# Altium PCB PCB1.PcbDoc
Units mm, origin at the board's own origin, x right, y up, seen from the top; angles counter-clockwise.
Board outline 50.2 x 48.7 mm, 2 copper layers (Top Layer, Bottom Layer); 7 components, 16 nets, 64 pads, 6 vias.
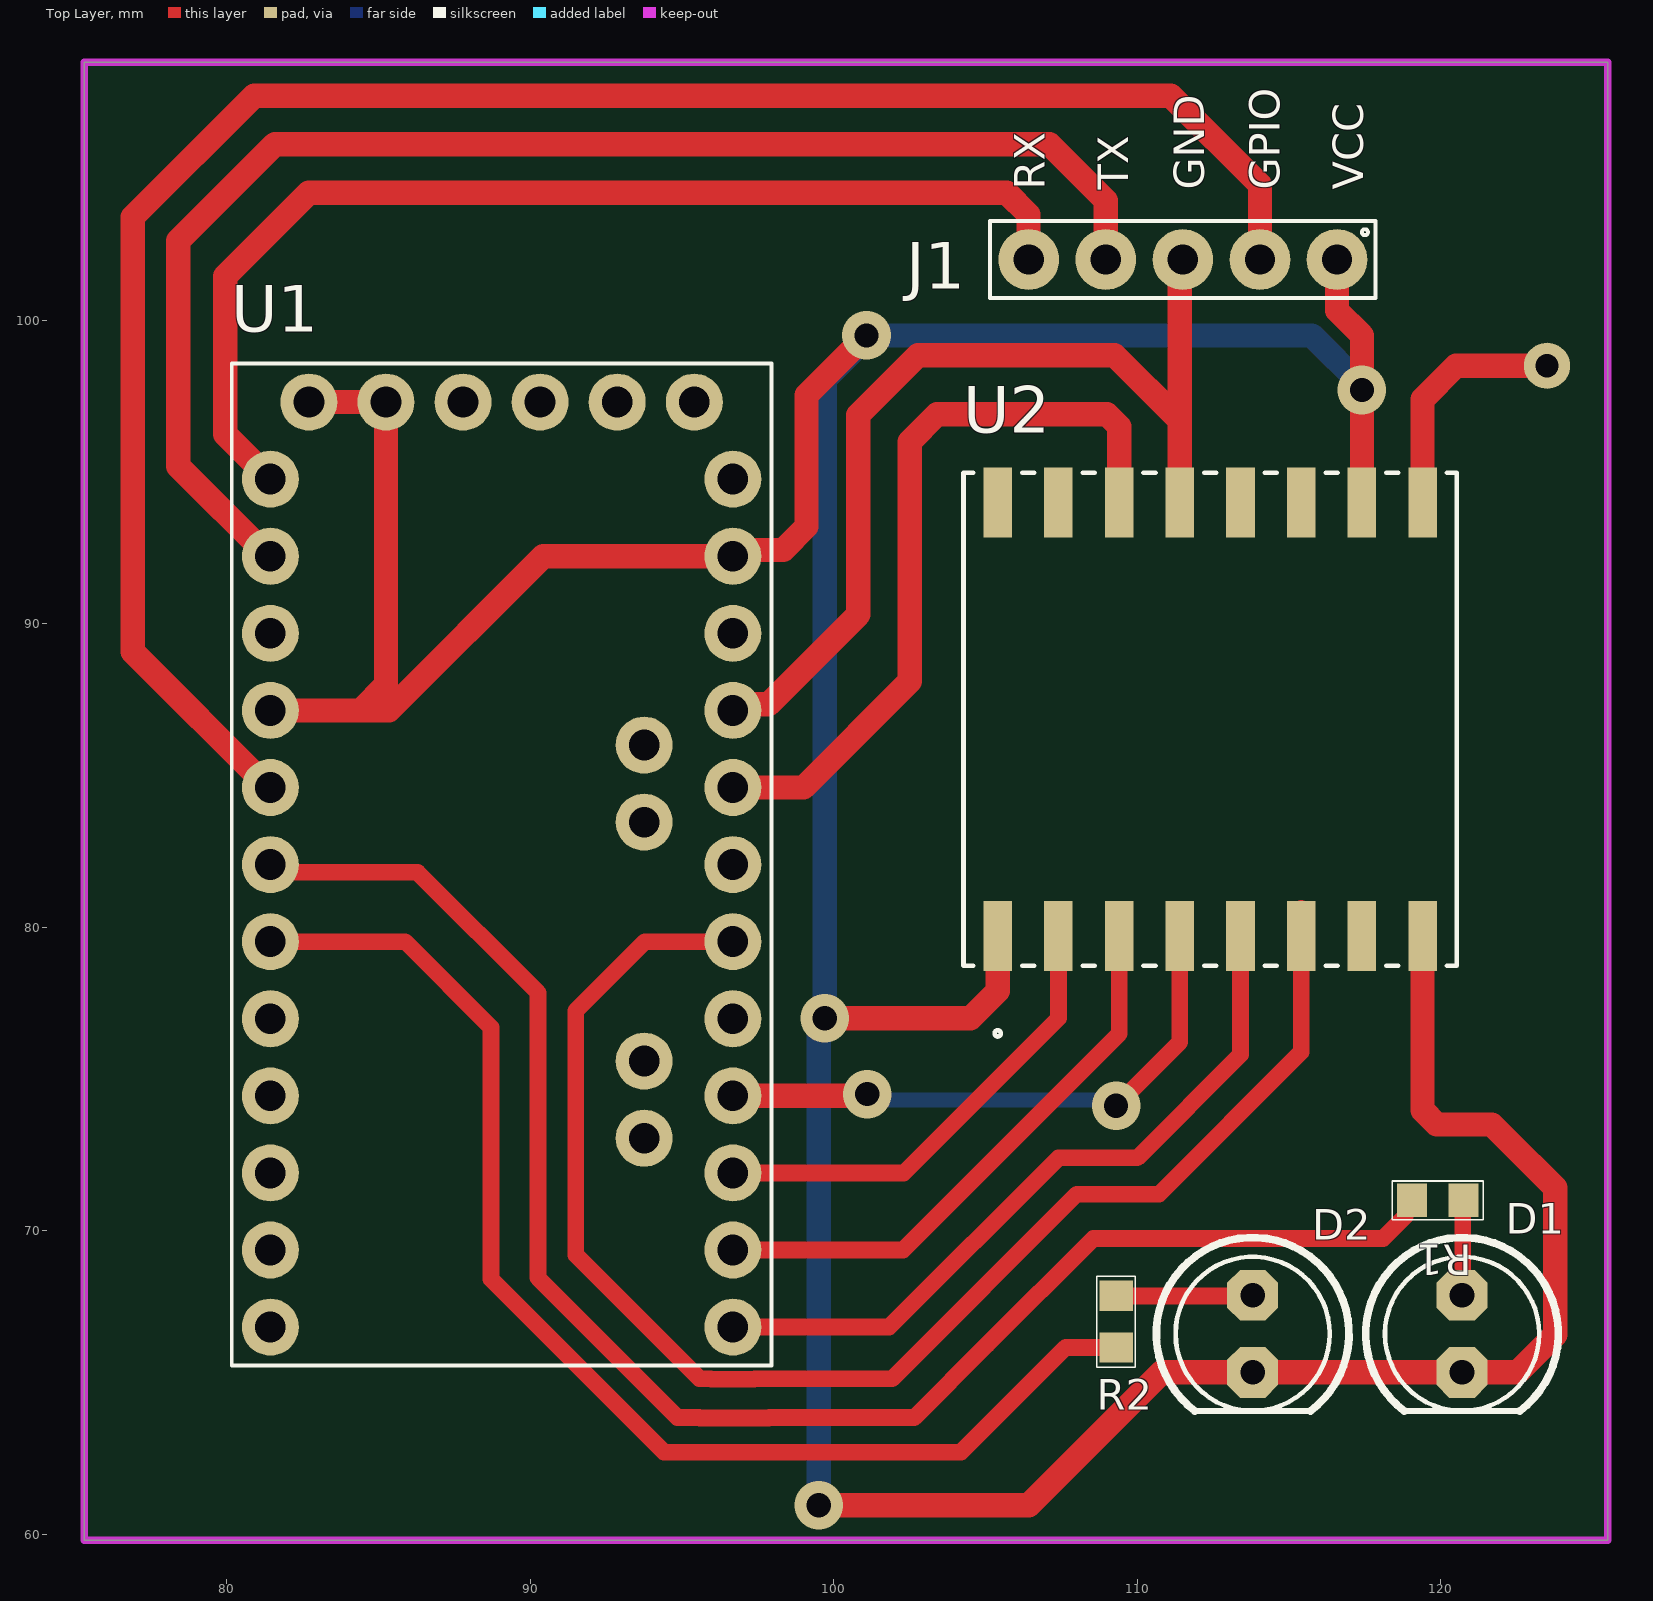
[diagram p0: Top Layer view]
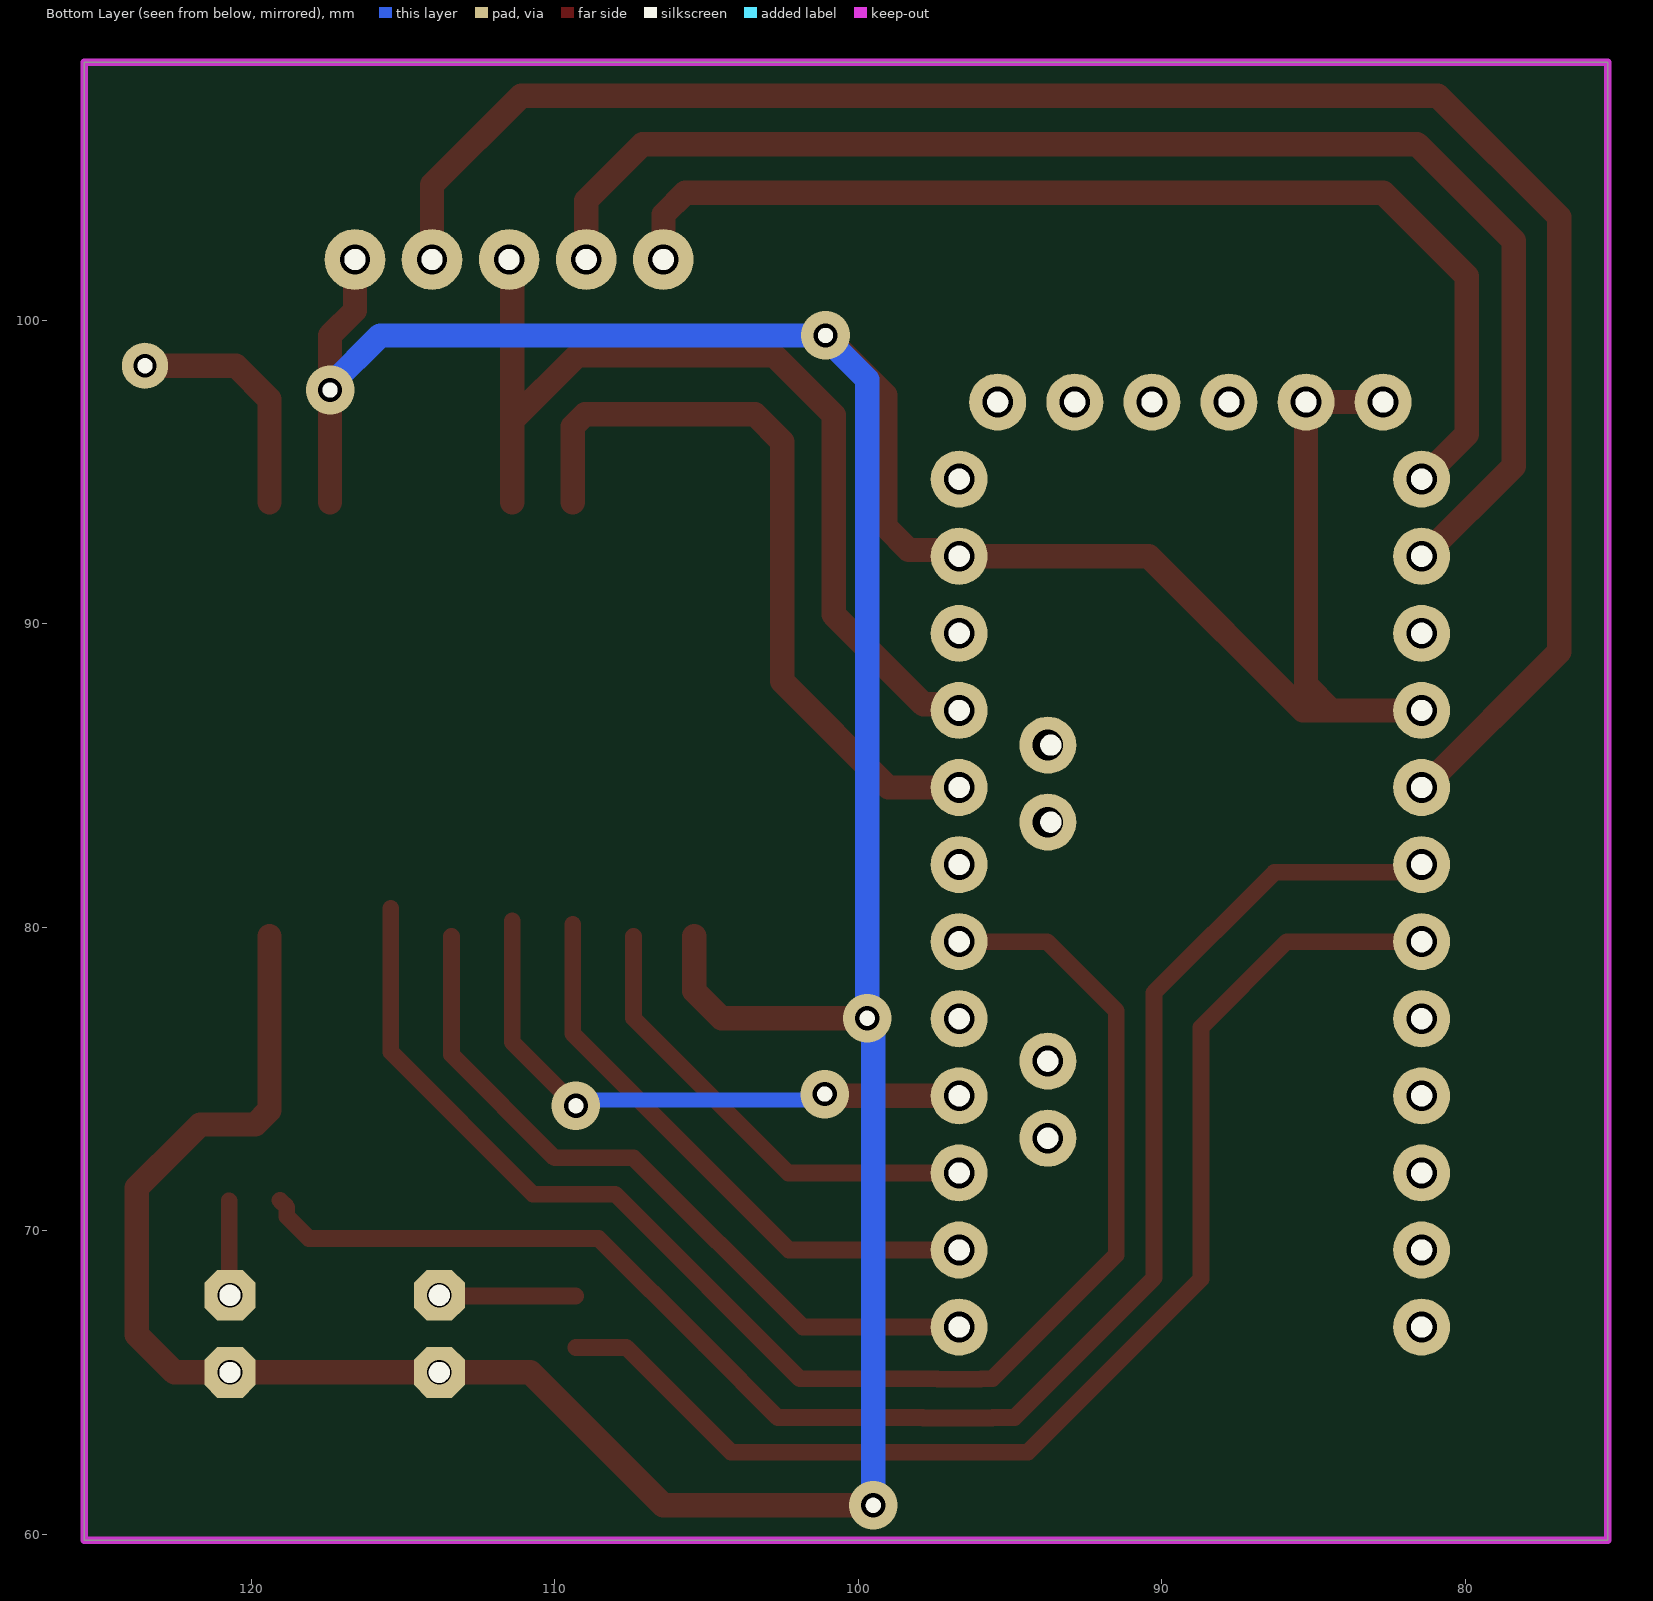
[diagram p1: Bottom Layer view, seen from below]
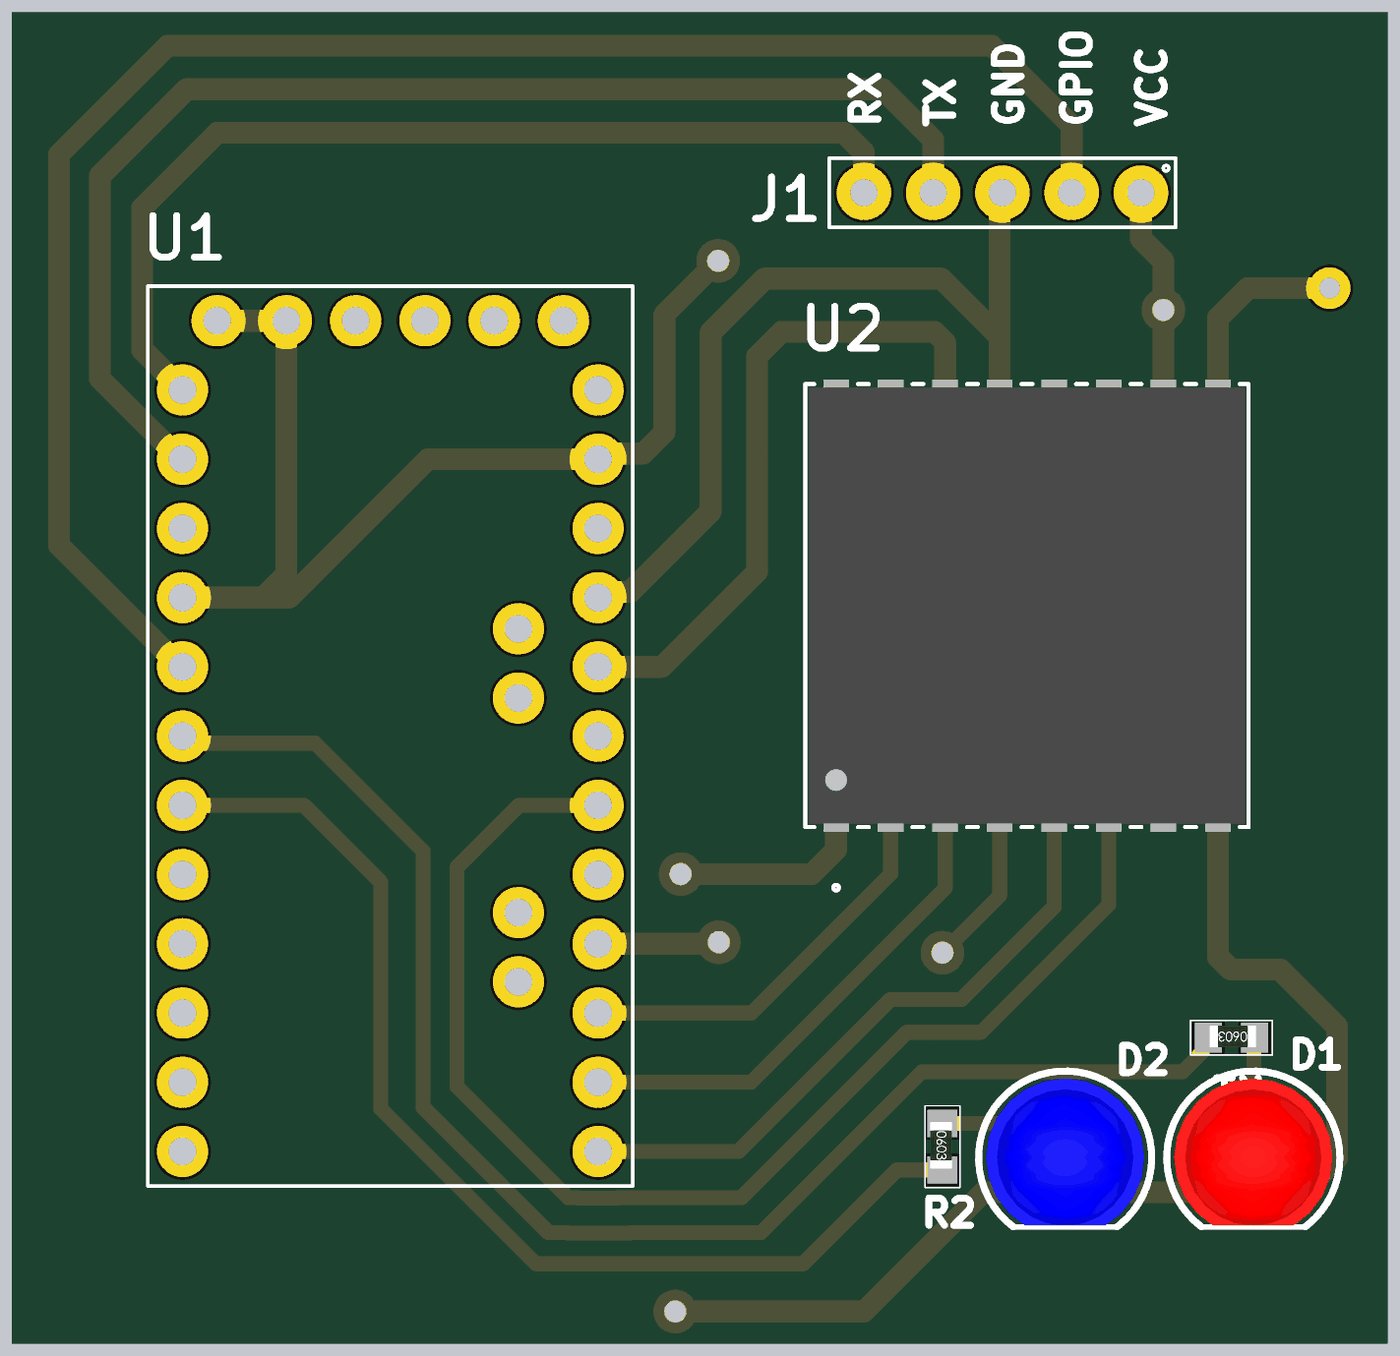
[diagram p2: 3D render of the assembled board from above, using the file's embedded part models]

## Layer stack, top to bottom
Top Solder: solder mask 0.0102, Solder Resist, Dk 3.5
Top Layer: signal copper 0.0356
Dielectric 1: dielectric 0.32, FR-4, Dk 4.8
Bottom Layer: signal copper 0.0356
Bottom Solder: solder mask 0.0102, Solder Resist, Dk 3.5

## Board outline
75.3,59.8 75.3,108.5 125.5,108.5 125.5,59.8

## Design rules (kind name [scope] priority, off if disabled: settings)
Clearance [All] p1: gap=0.5 ignorepadtopadclearanceinfootprint=FALSE except(0: Arc-Hole Track-Hole SMDPad-Hole THPad-Hole Via-Hole Fill-Hole Poly-Hole Region-Hole Text-Hole; 0.254: Via-Via; 0.3: Arc-Via Track-Via Via-Fill Via-Poly Via-Region)
PolygonConnect [All] p1: connectstyle=Relief reliefconductorwidth=0.254 reliefentries=4 polygonreliefangle="90 Angle" airgapwidth=0.254
RoutingVias [All] p1: holewidth=0.711 width=1.27 viastyle="Through Hole" minholewidth=0.711 minwidth=1.27 maxholewidth=0.711 maxwidth=1.27
SolderMaskExpansion [All] p1: expansion=0.102 istentingtop=FALSE
Width [All] p1: maxlimit=2 minlimit=0.152 preferedwidth=0.5
30 further rules are at their usual default settings.

## Components (designator, comment, footprint, x,y, rotation, side; value= is the part's Value field where it differs from the comment)
D1 "5MM-RED" LED5MM-RED 120.7,66.6 r270 top
D2 "5MM-BLUE" LED5MM-BLUE 113.8,66.6 r270 top
J1 "61300511121" 61300511121 111.5,102 r180 top
R1 "470R" R0603 119.9,71 r180 top
R2 "100R" R0603 109.3,67 r270 top
U1 "ARDUINO_PRO_MINI" MODULE_ARDUINO_PRO_MINI 89.051,82.063 r0 top
U2 "RFM95W-915S2" IC16_RFM95W-915S2_RFS 112.4,86.852 r90 top

## Footprints (in the part's own frame and the unit in brackets; to place one, negate y for a bottom-side part, rotate by r counter-clockwise, add the part's x,y. Pads: shape width x height; smd on the part's side, far side on the other; paste and mask are expansions set on the pad)
61300511121 [mm]
  round 2 hole 1: 1(-5.08,0) 2(-2.54,0) 3(0,0) 4(2.54,0) 5(5.08,0)
  silkscreen extent -6.35,-1.27 6.35,1.27
IC16_RFM95W-915S2_RFS [mm]
  rect 2.307x0.941 smd paste+0 mask+0: 1(-7.148,7) 2(-7.148,5) 3(-7.148,3) 4(-7.148,1) 5(-7.148,-1) 6(-7.148,-3) 7(-7.148,-5) 8(-7.148,-7) 9(7.148,-7) 10(7.148,-5) 11(7.148,-3) 12(7.148,-1) 13(7.148,1) 14(7.148,3) 15(7.148,5) 16(7.148,7)
  silkscreen extent -10.45,-8.13 8.13,8.13, body extent -8,-8 8,8, height 1.81
LED5MM-BLUE [mil]
  oct 66x66 hole 32: A(-50,0) C(50,0)
  silkscreen extent -125,-125 100,125, body extent -114,-114 98,114, height 344
LED5MM-RED [mil]
  oct 66x66 hole 32: A(-50,0) C(50,0)
  silkscreen extent -125,-125 100,125, body extent -114,-114 98,114, height 344
MODULE_ARDUINO_PRO_MINI [mil]
  round 74 hole 40: JP1_1(250,600) JP1_2(150,600) JP1_3(50,600) JP1_4(-50,600) JP1_5(-150,600) JP1_6(-250,600) JP2_1(185,55) JP2_2(185,155) JP3_1(185,-355) JP3_2(185,-255) JP6_1(300,500) JP6_2(300,400) JP6_3(300,300) JP6_4(300,200) JP6_5(300,100) JP6_6(300,0) JP6_7(300,-100) JP6_8(300,-200) JP6_9(300,-300) JP6_10(300,-400) JP6_11(300,-500) JP6_12(300,-600) JP7_1(-300,-600) JP7_2(-300,-500) JP7_3(-300,-400) JP7_4(-300,-300) JP7_5(-300,-200) JP7_6(-300,-100) JP7_7(-300,0) JP7_8(-300,100) JP7_9(-300,200) JP7_10(-300,300) JP7_11(-300,400) JP7_12(-300,500)
  silkscreen extent -350,-650 350,650
R0603 [mm]
  rect 1x1.1 smd: 1(-0.85,0) 2(0.85,0)
  silkscreen extent -1.5,-0.64 1.5,0.64, body extent -0.9,-0.45 0.8,0.35, height 0.56

## Part data
D1: library part LED5MM-RED, "LED RED 5MM", Color=Red, Category=Optoelectronics, ComponentLink1Description=https://datasheet.ciiva.com/29562/150141rs73100-29562993.pdf?src-supplier=Digi-Key, ComponentLink1URL=https://datasheet.ciiva.com/29562/150141rs73100-29562993.pdf?src-supplier=Digi-Key, ComponentLink2Description=https://datasheet.ciiva.com/29278/759464-da-01-en-smd-topled-einf-rot-150141rs73100-29278947.pdf?src-supplier=Conrad, ComponentLink2URL=https://datasheet.ciiva.com/29278/759464-da-01-en-smd-topled-einf-rot-150141rs73100-29278947.pdf?src-supplier=Conrad, ComponentLink3Description=https://datasheet.ciiva.com/29563/150141rs73100-29563031.pdf?src-supplier=Digi-Key, ComponentLink3URL=https://datasheet.ciiva.com/29563/150141rs73100-29563031.pdf?src-supplier=Digi-Key, ComponentLink4Description=https://datasheet.ciiva.com/29563/150141rs73100-29563032.pdf?src-supplier=Digi-Key, ComponentLink4URL=https://datasheet.ciiva.com/29563/150141rs73100-29563032.pdf?src-supplier=Digi-Key
D2: library part LED5MM-BLUE, "LED BLUE 5MM", Color=BLUE, Category=Optoelectronics, ComponentLink1Description=https://datasheet.ciiva.com/29562/150141rs73100-29562993.pdf?src-supplier=Digi-Key, ComponentLink1URL=https://datasheet.ciiva.com/29562/150141rs73100-29562993.pdf?src-supplier=Digi-Key, ComponentLink2Description=https://datasheet.ciiva.com/29278/759464-da-01-en-smd-topled-einf-rot-150141rs73100-29278947.pdf?src-supplier=Conrad, ComponentLink2URL=https://datasheet.ciiva.com/29278/759464-da-01-en-smd-topled-einf-rot-150141rs73100-29278947.pdf?src-supplier=Conrad, ComponentLink3Description=https://datasheet.ciiva.com/29563/150141rs73100-29563031.pdf?src-supplier=Digi-Key, ComponentLink3URL=https://datasheet.ciiva.com/29563/150141rs73100-29563031.pdf?src-supplier=Digi-Key, ComponentLink4Description=https://datasheet.ciiva.com/29563/150141rs73100-29563032.pdf?src-supplier=Digi-Key, ComponentLink4URL=https://datasheet.ciiva.com/29563/150141rs73100-29563032.pdf?src-supplier=Digi-Key
J1: "Connector Header Through Hole 5 position 0.100 (2.54mm)", Package=None, Availability="In Stock", Check_prices=https://www.snapeda.com/parts/61300511121/Wurth+Elektronik/view-part/?ref=eda, MF="WÃ¼rth Elektronik", MP=61300511121, Price=None, Purchase-URL=https://pricing.snapeda.com/search/part/61300511121/?ref=eda, SnapEDA_Link=https://www.snapeda.com/parts/61300511121/Wurth+Elektronik/view-part/?ref=snap
R1: library part CRCW0603470RFKEA, "RES SMD 470 OHM 1% 1/10W 0603", Case Code (Metric)=1608, Case Code (Imperial)=0603, Manufacturer 1=Vishay, Max Operating Temperature=155°C, Max Power Dissipation=100mW, Min Operating Temperature=-55°C, Package Quantity=10, Supplier Part Number 1=1469815, Temperature Coefficient=100ppm/°C, Tolerance=1%, Voltage Rating=75V, Case/Package=0603, Category=Resistors, ComponentLink1Description=http://www.vishay.com/docs/20035/dcrcwe3.pdf, ComponentLink1URL=http://www.vishay.com/docs/20035/dcrcwe3.pdf, ComponentLink2Description=http://uk.rs-online.com/webdocs/13ec/0900766b813ecbec.pdf, ComponentLink2URL=http://uk.rs-online.com/webdocs/13ec/0900766b813ecbec.pdf, ComponentLink3Description=https://www.verical.com/server-webapp/html/getDatasheet?partID=45798, ComponentLink3URL=https://www.verical.com/server-webapp/html/getDatasheet?partID=45798, ComponentLink4Description=http://www.vishay.com/docs/20008/dcrcw.pdf, ComponentLink4URL=http://www.vishay.com/docs/20008/dcrcw.pdf, ComponentLink5Description=http://www.mouser.com/ds/2/427/dcrcwe3-109170.pdf, ComponentLink5URL=http://www.mouser.com/ds/2/427/dcrcwe3-109170.pdf, ComponentLink6Description=http://www.farnell.com/datasheets/2111203.pdf, ComponentLink6URL=http://www.farnell.com/datasheets/2111203.pdf, ComponentLink7Description=http://www.farnell.com/datasheets/2045673.pdf, ComponentLink7URL=http://www.farnell.com/datasheets/2045673.pdf, ComponentLink8Description=https://www.distrelec.biz/Web/Downloads/a_/en/flD-CRCW-e3_data_en.pdf?mime=application%2Fpdf, ComponentLink8URL=https://www.distrelec.biz/Web/Downloads/a_/en/flD-CRCW-e3_data_en.pdf?mime=application%2Fpdf, Composition="Thick Film", Contact Plating=Lead,Tin, Depth=0.85mm, Description 1="RES SMD 470 OHM 1% 1/10W 0603", Features="Automotive AEC-Q200", Height=0.45mm, Lead Free="Lead Free", Length=1.55mm, Manufacturer Part Number 1=CRCW0603470RFKEA, Military Standard=Not, Mount="Surface Mount", Number of Terminations=2, Packaging="Tape and Reel", Power Rating=100mW, Pricing 1="10 = 0,01680, 250 = 0,01120, 1000 = 0,00700, 5000 = 0,00540 (EUR)", Radiation Hardening=No, REACH SVHC=Unknown, Resistance=470R, RoHS 1=Yes, Stock=19745, Supplier 1=Farnell, Termination=SMD/SMT, Voltage Rating (DC)=75V, Weight=7.1E-05oz, Width=0.033inch
R2: library part ERJ-P03F1000V, "RESISTOR, SURGE, 0603, 1%, 100R", Case Code (Metric)=1608, Case Code (Imperial)=0603, Manufacturer=Panasonic, Max Operating Temperature=155°C, Min Operating Temperature=-55°C, Package Quantity=5000, Power Rating=200mW, Supplier Part Number 1=P16017CT-ND, Temperature Coefficient=200ppm/°C, Tolerance=1%, Voltage Rating=150V, Case/Package=0603, Category=Resistors, ComponentLink1Description=https://datasheet.ciiva.com/11817/0900766b812cb812-11817071.pdf?src-supplier=RSComponents, ComponentLink1URL=https://datasheet.ciiva.com/11817/0900766b812cb812-11817071.pdf?src-supplier=RSComponents, ComponentLink2Description=https://datasheet.ciiva.com/24024/aoa0000ce4-64075-24024309.pdf?src-supplier=Mouser, ComponentLink2URL=https://datasheet.ciiva.com/24024/aoa0000ce4-64075-24024309.pdf?src-supplier=Mouser, ComponentLink3Description=https://datasheet.ciiva.com/9186/aoa0000ce4-9186919.pdf?src-supplier=Avnet, ComponentLink3URL=https://datasheet.ciiva.com/9186/aoa0000ce4-9186919.pdf?src-supplier=Avnet, ComponentLink4Description=https://datasheet.ciiva.com/48537/erjp-series-eng-tds-48537309.pdf?src-supplier=Distrelec, ComponentLink4URL=https://datasheet.ciiva.com/48537/erjp-series-eng-tds-48537309.pdf?src-supplier=Distrelec, ComponentLink5Description=https://datasheet.ciiva.com/7830/1790600-7830799.pdf?src-supplier=Element14, ComponentLink5URL=https://datasheet.ciiva.com/7830/1790600-7830799.pdf?src-supplier=Element14, ComponentLink6Description=https://datasheet.ciiva.com/48426/erjp-series-eng-tds-48426485.pdf?src-supplier=Distrelec, ComponentLink6URL=https://datasheet.ciiva.com/48426/erjp-series-eng-tds-48426485.pdf?src-supplier=Distrelec, ComponentLink7Description=https://datasheet.ciiva.com/17208/aoa0000ce4-17208006.pdf?src-supplier=Avnet+Europe, ComponentLink7URL=https://datasheet.ciiva.com/17208/aoa0000ce4-17208006.pdf?src-supplier=Avnet+Europe, Composition="Thick Film", Contact Plating=Tin, Depth=0.8mm, Height=0.45mm, Length=1.6mm, Manufacturer Part Number=ERJ-P03F1000V, Military Standard=Not, Mount="Surface Mount", Number of Pins=2, Packaging="Tape and Reel", Pricing 1="1 = 0,40000, 10 = 0,34200, 100 = 0,13360, 1000 = 0,05594, 2500 = 0,05127 (USD)", Radiation Hardening=No, REACH SVHC="No SVHC", Resistance=100R, RoHS=Yes, Stock 1=162, Supplier 1=Digi-Key, Termination=Tab, Voltage Rating (DC)=150V, Width=0.8mm
U1: "This board was developed for applications and installations where space is premium and projects are made as permanent set ups. Small, available in 3.3 V and 5 V versions, powered by ATmega328P.", Package=None, Availability="Not in stock", Check_prices=https://www.snapeda.com/parts/Arduino%20Pro%20Mini/Arduino/view-part/?ref=eda, MF=Arduino, MP="Arduino Pro Mini", Price=None, SnapEDA_Link=https://www.snapeda.com/parts/Arduino%20Pro%20Mini/Arduino/view-part/?ref=snap
U2: "No Description Available", Mfr_Name="RF Solutions", Copyright="Copyright (C) 2023 Ultra Librarian. All rights reserved.", Manufacturer_Part_Number=RFM95W-915S2, RefDes=RefDes, Type=DEV

## Free pads (board coordinates)
  round 1.524 hole 0.762: 3(123.5,98.5)

## Via types
v1: diameter 1.6, hole 0.8, Top Layer to Bottom Layer, 6 vias

## Nets (pads, with @x,y where several pads share a name; then routed paths per layer and width w, separated by ;. In a path a pad name is that pad's centre, name@x,y a point inside that pad or via, vN(x,y) a via of type N, cw(c..) or ccw(c..) an arc to the next point about the centre after c; other vN are vias at no path point)
ANT: pad.3 U2.9 | length 8
  Top Layer w0.8: U2.9 119.4,97.4 120.5,98.5 pad.3
DIO0: U1.JP6_5 U2.14 | length 25.1
  Top Layer w0.8: U1.JP6_5 99.003,84.603 102.5,88.1 102.5,96 103.4,96.9 109,96.9 109.4,96.5 U2.14
GND: D1.C D2.C J1.1 U1.JP1_5 U1.JP1_6 U1.JP6_2 U1.JP7_9 U2.1 U2.8 U2.10 | length 155.3
  Top Layer w0.8: U1.JP7_9 84.4,87.143 ; U1.JP1_6 U1.JP1_5 85.241,87.984 84.4,87.143 ; v1(99.5,60.95) 106.423,60.95 110.803,65.33 D2.C D1.C 122.53,65.33 123.769,66.569 123.769,71.413 122.15,73.031 121.681,73.5 119.869,73.5 119.4,73.969 U2.8 ; v1(99.7,77) 104.5,77 105.4,77.9 U2.1 ; v1(101.075,99.5) 99.1,97.525 99.1,93.2 98.33,92.43 96.878,92.43 U1.JP6_2 90.423,92.223 85.343,87.143 84.4,87.143 ; J1.1 116.58,100.32 117.4,99.5 v1(117.4,97.7) U2.10
  Bottom Layer w0.8: v1(99.5,60.95) 99.5,76.584 99.7,76.784 99.7,98.047 101.075,99.422 v1(101.075,99.5) ; v1@101.3,99.6 101.4,99.5 115.75,99.5 117.4,97.85 v1(117.4,97.7)
GPIO: J1.2 U1.JP7_8 | length 63.2
  Top Layer w0.8: U1.JP7_8 81.369,84.603 76.9,89.072 76.9,103.4 80.9,107.4 111.1,107.4 114.04,104.46 J1.2
LED1: R1.2 U1.JP7_7 | length 53.8
  Top Layer w0.55: U1.JP7_7 81.685,81.809 82.417,81.809 82.418,81.808 86.287,81.808 90.25,77.845 90.25,68.445 94.85,63.845 95.569,63.845 95.586,63.828 97.856,63.828 97.873,63.845 102.65,63.845 105.05,66.245 108.55,69.745 118.1,69.745 118.825,70.469 118.825,70.775 R1.2
LED2: R2.2 U1.JP7_6 | length 41.1
  Top Layer w0.55: U1.JP7_6 85.877,79.523 88.7,76.7 88.7,68.4 94.4,62.7 104.187,62.7 107.638,66.15 R2.2
MISO: U1.JP6_10 U2.2 | length 15.5
  Top Layer w0.55: U1.JP6_10 102.303,71.903 107.4,77 U2.2
MOSI: U1.JP6_11 U2.3 | length 19.3
  Top Layer w0.55: U1.JP6_11 102.277,69.363 109.4,76.486 U2.3@109.4,80.095
NetD1_A: D1.A R1.1 | length 3.2
  Top Layer w0.5: D1.A D1.A@120.725,67.895 ; R1.1@120.725,70.975 R1.1
  Top Layer w0.55: D1.A@120.725,67.895 R1.1@120.725,70.975
NetD2_A: D2.A R2.1 | length 4.5
  Top Layer w0.55: R2.1 D2.A@113.78,67.85
RST: U1.JP6_7 U2.6 | length 49
  Top Layer w0.55: U1.JP6_7 93.773,79.523 91.5,77.25 91.5,69.2 95.575,65.125 95.944,65.125 95.961,65.108 97.381,65.108 97.398,65.125 101.925,65.125 108,71.2 110.714,71.2 115.4,75.886 U2.6@115.4,80.623
RX: J1.5 U1.JP7_12 | length 36.7
  Top Layer w0.8: U1.JP7_12 79.949,96.245 79.949,101.449 82.7,104.2 105.7,104.2 106.417,103.484 106.417,102.003 J1.5
SCK: U1.JP6_9 U2.4 | length 19.8
  Top Layer w0.55: v1(109.3,74.115) 111.4,76.215 U2.4 U2.4@111.4,80.212
  Top Layer w0.8: U1.JP6_9 101.043,74.443 v1(101.1,74.5)
  Bottom Layer w0.5: v1(101.1,74.5) 101.293,74.307 109.107,74.307 v1(109.3,74.115)
SS: U1.JP6_12 U2.5 | length 24.4
  Top Layer w0.55: U1.JP6_12 101.823,66.823 107.4,72.4 110,72.4 113.4,75.8 U2.5
TX: J1.4 U1.JP7_11 | length 46.3
  Top Layer w0.8: U1.JP7_11 81.369,92.223 78.4,95.192 78.4,102.618 81.582,105.8 107.106,105.8 108.96,103.946 J1.4
VCC: J1.3 U1.JP6_4 U2.13 | length 32.7
  Top Layer w0.8: U1.JP6_4@96.464,87.35 U1.JP6_4 96.878,87.35 97.85,87.35 100.8,90.3 100.8,96.875 102.775,98.85 109.25,98.85 111.4,96.7 ; U2.13 111.4,96.7 ; J1.3 111.4,101.9 111.4,96.7
pads on no net: U1.JP1_1 U1.JP1_2 U1.JP1_3 U1.JP1_4 U1.JP2_1 U1.JP2_2 U1.JP3_1 U1.JP3_2 U1.JP6_1 U1.JP6_3 U1.JP6_6 U1.JP6_8 U1.JP7_1 U1.JP7_2 U1.JP7_3 U1.JP7_4 U1.JP7_5 U1.JP7_10 U2.7 U2.11 U2.12 U2.15 U2.16

## Keep-outs
Keep-Out Layer:
  the board outline again, w0.254

## Silkscreen, mask and mechanical layers (free items; w line width, h text height)
Top Overlay:
  text "RX" at 106.95,104.3 h1 r90
  text "TX" at 109.7,104.3 h1 r90
  text "GND" at 112.2,104.3 h1 r90
  text "GPIO" at 114.7,104.3 h1 r90
  text "VCC" at 117.45,104.3 h1 r90
Bottom Overlay:
  circle w0.3: c99.5,60.95 r0.1
  circle w0.3: c109.3,74.115 r0.1
  circle w0.3: c101.1,74.5 r0.1
  circle w0.3: c99.7,77 r0.1
  circle w0.3: c101.075,99.5 r0.1
  circle w0.3: c117.4,97.7 r0.1
  circle w0.3: c123.5,98.5 r0.1
  circle w0.5: c93.65,83.46 r0.1
  circle w0.5: c93.65,86 r0.1
  circle w0.5: c120.7,65.33 r0.1
  circle w0.5: c120.7,67.87 r0.1
  circle w0.5: c93.75,75.586 r0.1
  circle w0.5: c93.75,73.046 r0.1
  circle w0.5: c113.8,67.87 r0.1
  circle w0.5: c113.8,65.33 r0.1
  circle w0.5: c114.04,102 r0.1
  circle w0.5: c111.5,102 r0.1
  circle w0.5: c116.58,102 r0.1
  circle w0.5: c108.96,102 r0.1
  circle w0.5: c95.401,97.303 r0.1
  circle w0.5: c108.96,102 r0.1
  circle w0.5: c106.42,102 r0.1
  circle w0.5: c87.781,97.303 r0.1
  circle w0.5: c85.241,97.303 r0.1
  circle w0.5: c81.431,66.823 r0.1
  circle w0.5: c81.431,69.363 r0.1
  circle w0.5: c96.671,69.363 r0.1
  circle w0.5: c96.671,66.823 r0.1
  circle w0.5: c96.671,79.523 r0.1
  circle w0.5: c96.671,82.063 r0.1
  circle w0.5: c96.671,74.443 r0.1
  circle w0.5: c96.671,71.903 r0.1
  circle w0.5: c96.671,76.983 r0.1
  circle w0.5: c96.671,92.223 r0.1
  circle w0.5: c96.671,94.763 r0.1
  circle w0.5: c96.671,87.143 r0.1
  circle w0.5: c96.671,84.603 r0.1
  circle w0.5: c96.671,89.683 r0.1
  circle w0.5: c81.431,79.523 r0.1
  circle w0.5: c81.431,82.063 r0.1
  circle w0.5: c81.431,74.443 r0.1
  circle w0.5: c81.431,71.903 r0.1
  circle w0.5: c81.431,76.983 r0.1
  circle w0.5: c81.431,92.223 r0.1
  circle w0.5: c81.431,94.763 r0.1
  circle w0.5: c81.431,87.143 r0.1
  circle w0.5: c81.431,84.603 r0.1
  circle w0.5: c81.431,89.683 r0.1
  circle w0.5: c92.861,97.303 r0.1
  circle w0.5: c82.701,97.303 r0.1
  circle w0.5: c90.321,97.303 r0.1
  circle w0.5: c90.321,97.303 r0.1
  circle w0.5: c85.241,97.303 r0.1
  circle w0.5: c87.781,97.303 r0.1
  circle w0.5: c82.701,97.303 r0.1
  circle w0.5: c95.401,97.303 r0.1
  circle w0.5: c92.861,97.303 r0.1
Board:
  lines w0.254: 75.3,60.5 125.5,60.5 125.5,108.5 75.3,108.5 75.3,60.5